# EAGLE board usb_ext_board (EAGLE 8.4.2)
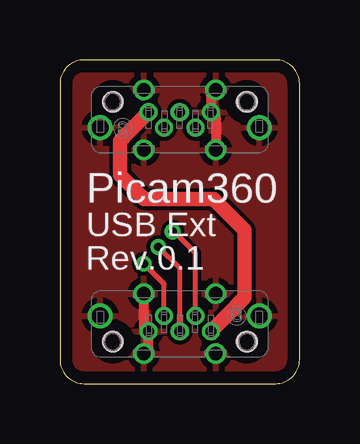
[diagram p0: board, top side]
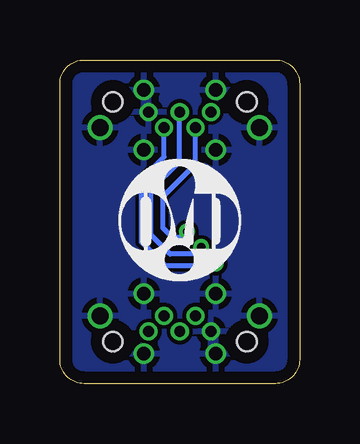
[diagram p1: board, bottom side, seen from below]

Size 10 x 13.5 mm. Coordinates in mm from the lower left corner, seen from the top.
Outline: 1,0 9,0 arc90 10,1 10,12.5 arc90 9,13.5 1,13.5 arc90 0,12.5 0,1 arc90 1,0
Copper layers (1*16): Top 0.035mm / dielectric 1.6mm / Bottom 0.035mm
Design rules "Elecrow_2-layer_PCB_eagle_rule": minimum track width 6mil, minimum drill 12mil, track to track 6mil, track to pad 6mil, pad to pad 6mil, via to via 8mil, smd to smd 0mil, copper to edge 20mil, drill to drill 10mil, minimum pad ring 6mil, minimum via ring 6mil, stop-mask expansion 0mil, vias tented up to drill 100mil, thermal gap 10mil

## Footprints (pad centres in the part's own frame; a part is rotated, then mirrored left to right if it is on the bottom)
USB3150-30-130 = drill 0.45 pad 0.7: D+@3 0,-0.325; D-@2 0.65,0.325; GND@5 -1.3,-0.325; ID@4 -0.65,0.325; VCC@1 1.3,-0.325 | drill 0.55 pad 0.8: SHELL@6 -1.5,1.25; SHELL@7 1.5,1.25; SHELL@8 -1.5,-1.25; SHELL@9 1.5,-1.25 | drill 0.7 pad 0.95: SHELL@10 -3.325,0.325; SHELL@11 3.325,0.325 | hole 0.8: -2.8,-0.745; 2.8,-0.745

## Placement (x,y rotation side)
LOGO1  [OHMYDIGIFAB_LOGO]  4.99,6.77 0 bottom
MALE1  USB-ID  [USB3150-30-130]  5,11 180 top
MALE2  USB-ID  [USB3150-30-130]  5,2.5 0 top

## Library data of the parts
LOGO1 MALE1 MALE2 = openblw

## Nets
D+: MALE1.D+@3 MALE2.D+@3
D-: MALE1.D-@2 MALE2.D-@2
GND: MALE1.GND@5 MALE1.SHELL@6 MALE1.SHELL@7 MALE1.SHELL@8 MALE1.SHELL@9 MALE1.SHELL@10 MALE1.SHELL@11 MALE2.GND@5 MALE2.SHELL@6 MALE2.SHELL@7 MALE2.SHELL@8 MALE2.SHELL@9 MALE2.SHELL@10 MALE2.SHELL@11
ID: MALE1.ID@4 MALE2.ID@4
VCC: MALE1.VCC@1 MALE2.VCC@1

## Tracks (layer width: path | path; a pad name or v marks a point on that pad's centre or on a via)
D+  (via drill 0.35)
  Top 0.2: MALE2.D+@3 5,4.8 v4.1,5.7
  Bottom 0.2: v4.1,5.7 4.4,5.4 5.4,5.4 6.2,6.2 6.2,8.09 5.02,9.27 5.02,11.3 MALE1.D+@3
D-  (via drill 0.35)
  Top 0.2: MALE2.D-@2 5.65,5.45 4.8,6.3 v4.7,6.34
  Bottom 0.2: v4.7,6.34 4.94,6.1 5.3,6.1 5.7,6.5 5.7,7.8 4.35,9.15 MALE1.D-@2
GND
  Top 0.406: MALE1.SHELL@6 6.5,11.12 MALE1.GND@5 6.3,12.05 MALE1.SHELL@8 | MALE2.SHELL@6 3.5,2.38 MALE2.GND@5 3.7,1.45 MALE2.SHELL@8
  pour Top: 0,13.5 10,13.5 10,0 0,0
  pour Bottom: 10,13.5 0,13.5 0,0 10,0
ID  (via drill 0.35)
  Top 0.2: MALE2.ID@4 4.35,4.15 v3.5,5
  Bottom 0.2: v3.5,5 3.6,4.9 5.6,4.9 6.6,5.9 6.6,8.5 5.65,9.45 MALE1.ID@4
VCC
  Top 0.61: MALE1.VCC@1 2.66,10.28 2.66,10.27 2.5,10.11 2.5,8.7 3.5,7.7 6.4,7.7 7.7,6.4 7.7,3.59 7.34,3.23 7.34,3.22 MALE2.VCC@1

## Text on the board
tPlace: Picam360 | USB Ext | Rev.0.1
Document: raspi spacer 11.0mm / micro usb hight 2.5mm